# Altium PCB FT2232H.PcbDoc
Units mil, origin at the board's own origin, x right, y up, seen from the top; angles counter-clockwise.
Board outline 1955 x 1965 mil, 2 copper layers (Top Layer, Bottom Layer); 54 components, 55 nets, 224 pads, 68 vias.
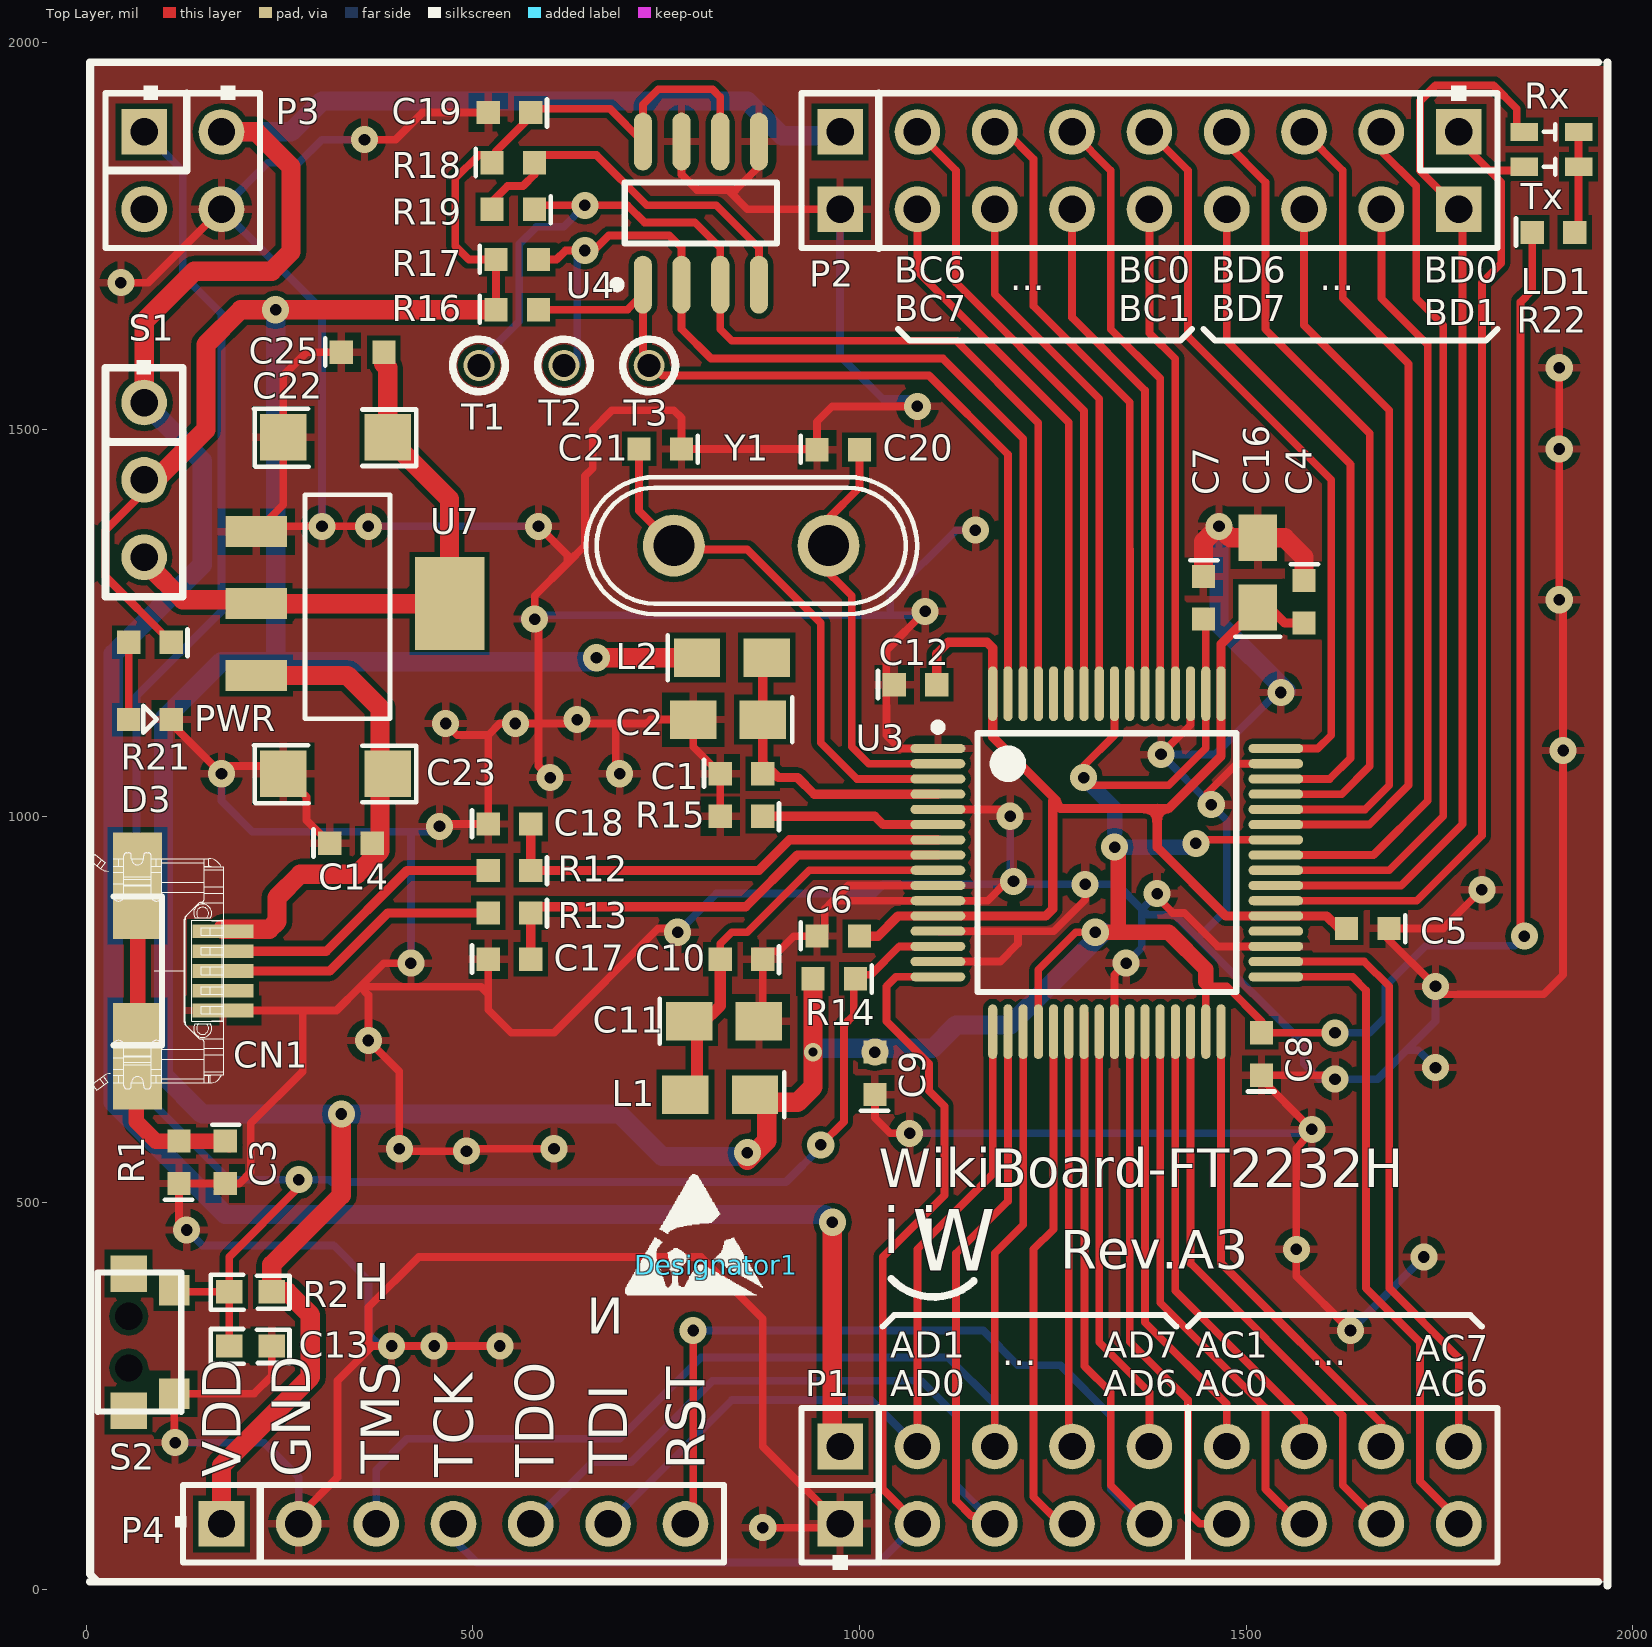
[diagram p0: Top Layer view]
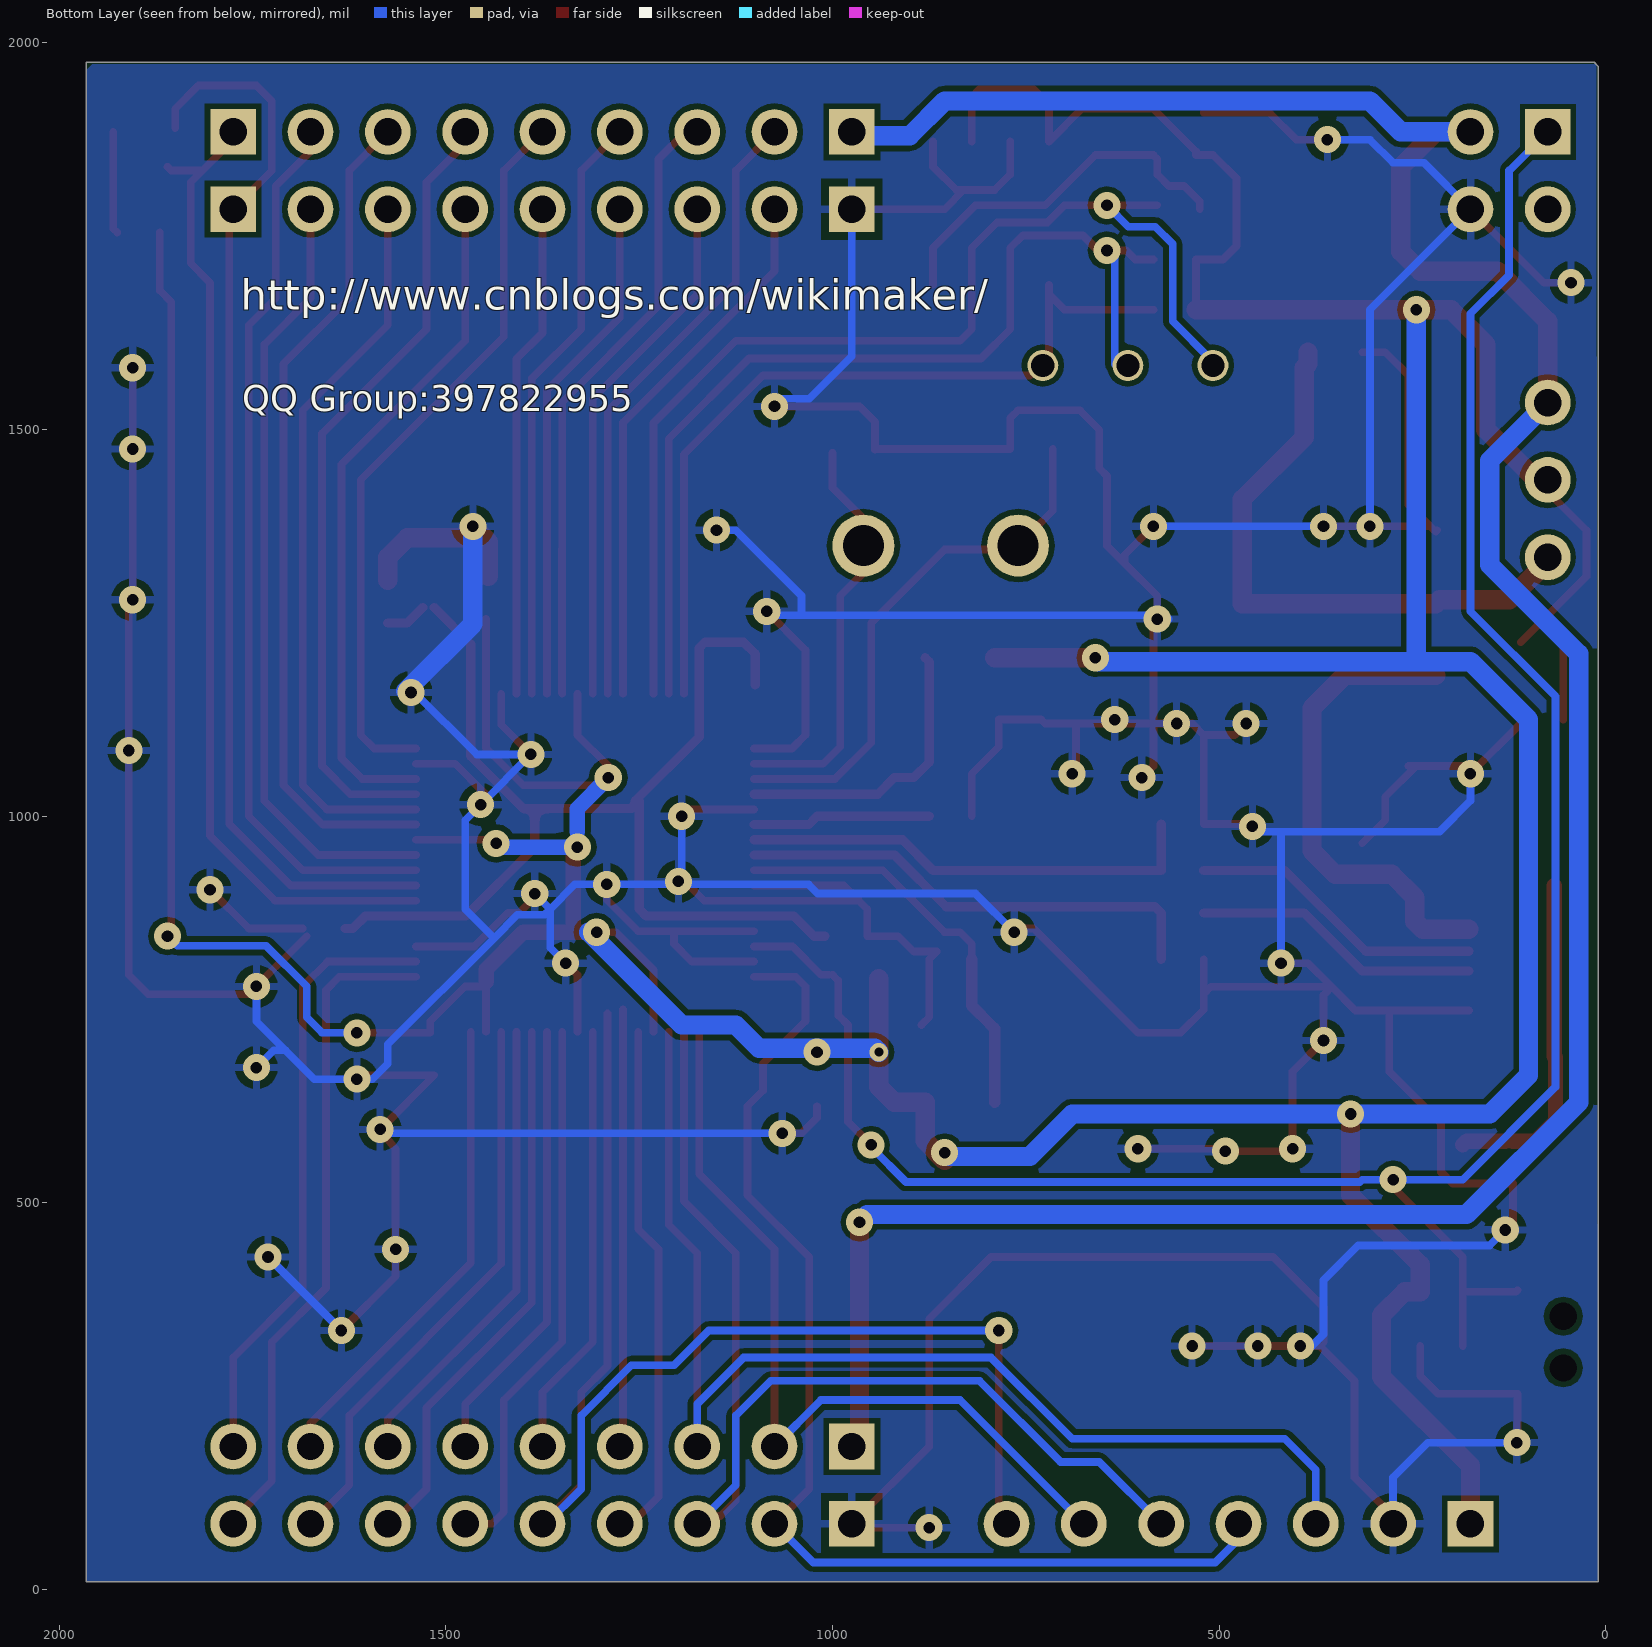
[diagram p1: Bottom Layer view, seen from below]

## Layer stack, top to bottom
Top Solder: solder mask 0.4, Solder Resist, Dk 3.5
Top Layer: signal copper 1.4
Dielectric1: dielectric 12.6, FR-4, Dk 4.8
Bottom Layer: signal copper 1.4
Bottom Solder: solder mask 0.4, Solder Resist, Dk 3.5

## Board outline
10,1970 15,1975 1965,1975 1965,10 10,10

## Design rules (kind name [scope] priority, off if disabled: settings)
Clearance [All] p1: gap=7
PolygonConnect [All] p1: connectstyle=Relief reliefconductorwidth=10 reliefentries=4 polygonreliefangle="90 Angle" airgapwidth=10
RoomDefinition FT2232H [InComponentClass('FT2232H')] p1: confinementstyle=ConfineIn formatcopy=TRUE lockcomponents=FALSE outline 0,0 1965,0 1965,1975 0,1975
RoomDefinition Connector&Power [InComponentClass('Connector&Power')] p2: confinementstyle=ConfineIn formatcopy=TRUE lockcomponents=FALSE outline 10,10 1965,10 1965,1970 10,1970
RoutingVias [All] p1: holewidth=15 width=35 viastyle="Through Hole" minholewidth=15 minwidth=35 maxholewidth=15 maxwidth=35
SilkToSolderMaskClearance SilkscreenOverComponentPads [IsPad] p1: minsilkscreentomaskgap=10 clearancetoexposedcopper=TRUE
SolderMaskExpansion [All] p1: expansion=4
Width [All] p1: maxlimit=50 minlimit=10 preferedwidth=10 minimp=50.000000 maximp=50.000000 favimp=50.000000
28 further rules are at their usual default settings.

## Classes and differential pairs
component class FT2232H: C1 C2 C3 C4 C5 C6 C7 C8 C9 C10 C11 C12 C14 C16 C17 C18 C19 C20 C21 CN1 L1 L2 R1 R12 R13 R14 R15 R16 R17 R18 R19 T1 T2 T3 U3 U4 Y1
component class Connector&Power: C13 C22 C23 C25 D3 LD1 P1 P2 P3 P4 R2 R21 R22 S1 S2 U7

## Components (designator, comment, footprint, x,y, rotation, side; value= is the part's Value field where it differs from the comment)
C1 "100nF" 0603M 820,1055 r0 top
C2 "4.7uF 16V" 0805M 875,1125 r180 top
C3 "47pF" 0603M 180,580 r270 top
C4 "100nF" 0603M 1575,1305 r270 top
C5 "100nF" 0603M 1685,855 r180 top
C6 "100nF" 0603M 945,845 r0 top
C7 "100nF" 0603M 1445,1310 r270 top
C8 "100nF" 0603M 1520,665 r90 top
C9 "100nF" 0603M 1020,640 r90 top
C10 "100nF" 0603M 875,815 r180 top
C11 "4.7uF 16V" 0805M 780,735 r0 top
C12 "100nF" 0603M 1045,1170 r0 top
C13 "10uF" 0603L 240,315 r180 top
C14 "100nF" 0603M 315,965 r0 top
C16 "3.3uF" 0805M 1515,1270 r90 top
C17 "47pF" 0603M 520,815 r0 top
C18 "47pF" 0603M 520,990 r0 top
C19 "0.1uF" 0603M 575,1910 r180 top
C20 "22pF" 0603M 945,1474 r0 top
C21 "22pF" 0603M 770,1475 r180 top
C22 "10uF 16V" 1206 390,1490 r180 top
C23 "10uF 16V" 1206 390,1055 r180 top
C25 "100n" 0603M 330,1600 r0 top
CN1 "USB-Micro" USB-MICRO-Lite 70,800 r90 top
D3 "RED" 0603pn 55,1125 r0 top
Designator1 "Comment" NoTouch 815,420 r0 top
L1 "Inductor" 0805M 865,640 r180 top
L2 "Inductor" 0805M 790,1205 r0 top
LD1 "LTST-C195KGJRKT" 0805-LED-Bi 1855,1865 r0 top
P1 "Header 9X2" HDR2X9/2.54MM#1 975,85 r0 top
P2 "Header 9X2" HDR2X9/2.54MM#2 1775,1885 r180 top
P3 "Header 2X2" HDR2X2/2.54MM 75,1885 r270 top
P4 "JTAG Header 7-Pin" HDR1X7/2.54MM 175,85 r0 top
R1 "27R" 0603M 120,525 r90 top
R2 "10K" 0603L 240,385 r180 top
R12 "27R" 0603M 575,930 r180 top
R13 "27R" 0603M 575,875 r180 top
R14 "10K" 0603M 995,790 r180 top
R15 "12K/1%" 0603M 875,1000 r180 top
R16 "10K" 0603M 530,1655 r0 top
R17 "10K" 0603M 530,1720 r0 top
R18 "10K" 0603M 525,1845 r0 top
R19 "2.2K" 0603M 580,1785 r180 top
R21 "1K" 0603M 110,1225 r180 top
R22 "1K" 0603M 1870,1755 r0 top
S1 "Switch" HDR1X3/2.54mm 75,1535 r270 top
S2 "" KEY-2x4-SMD 55,320 r90 top
T1 "TP" TP-HOLE 515,1580 r0 top
T2 "TP" TP-HOLE 625,1580 r0 top
T3 "TP" TP-HOLE 735,1580 r0 top
U3 "FT2232H" LQFP-64_N 1320,940 r0 top
U4 "93C46B" SO8_L 795,1780 r90 top
U7 "1117-3.3V" SOT-223 345,1275 r180 top
Y1 "12MHz" XTAL_socket 860,1350 r180 top

## Footprints (in the part's own frame and the unit in brackets; to place one, negate y for a bottom-side part, rotate by r counter-clockwise, add the part's x,y. Pads: shape width x height; smd on the part's side, far side on the other; paste and mask are expansions set on the pad)
0603L [mil] "0603 LONG"
  rect 33.94x30 smd: 1(0,0) 2(55,0)
  silkscreen extent -23,-22 79,23
0603M [mil]
  rect 30x30 smd: 1(0,0) 2(55,0)
  silkscreen extent -21,-17 -21,18, body extent -5,-15 60,15, height 43
0603pn [mil]
  rect 30x30 smd: 1(0,0) 2(55,0)
  silkscreen extent 19,-17 36,18
0805-LED-Bi [mm]
  rect 0.9x0.6 smd: 1(0.127,-0.635) 2(0.127,0.508) 3(1.905,0.508) 4(1.905,-0.635)
  silkscreen extent 0.76,-0.89 1.14,0.76, body extent 0.32,-1.02 1.72,0.9, height 1.1
0805M [mil]
  rect 60x50 smd: 1(0,0) 2(90,0)
  silkscreen extent -38,-29 -38,29
1206 [mil]
  rect 60x60 smd: 1(0,0) 2(135,0)
  silkscreen extent -37,-37 173,38, body extent 15,-30 120,30, height 43
HDR1X3/2.54mm [mm]
  round 1.5 hole 0.9: 1(0,0) 2(2.54,0) 3(5.08,0)
  silkscreen extent -1.4,-1.27 6.38,1.27
HDR1X7/2.54MM [mm] "Connector; Header; 7 Position"
  rect 1.5x1.5 hole 0.9: 1(0,0)
  round 1.5 hole 0.9: 2(2.54,0) 3(5.08,0) 4(7.62,0) 5(10.16,0) 6(12.7,0) 7(15.24,0)
  silkscreen extent -1.52,-1.27 16.51,1.27
HDR2X2/2.54MM [mm] "Connector; Header; 2x2 Position"
  rect 1.5x1.5 hole 0.9: 1(0,0)
  round 1.5 hole 0.9: 2(0,2.54) 3(2.54,0) 4(2.54,2.54)
  silkscreen extent -1.52,-1.27 3.81,3.81
HDR2X9/2.54MM#1 [mm]
  rect 1.5x1.5 hole 0.9: 1(0,0) 2(0,2.54)
  round 1.5 hole 0.9: 3(2.54,0) 4(2.54,2.54) 5(5.08,0) 6(5.08,2.54) 7(7.62,0) 8(7.62,2.54) 9(10.16,0) 10(10.16,2.54) 11(12.7,0) 12(12.7,2.54) 13(15.24,0) 14(15.24,2.54) 15(17.78,0) 16(17.78,2.54) 17(20.32,0) 18(20.32,2.54)
  silkscreen extent -1.27,-1.52 21.59,3.81
HDR2X9/2.54MM#2 [mm]
  rect 1.5x1.5 hole 0.9: 1(0,0) 2(0,2.54) 17(20.32,0) 18(20.32,2.54)
  round 1.5 hole 0.9: 3(2.54,0) 4(2.54,2.54) 5(5.08,0) 6(5.08,2.54) 7(7.62,0) 8(7.62,2.54) 9(10.16,0) 10(10.16,2.54) 11(12.7,0) 12(12.7,2.54) 13(15.24,0) 14(15.24,2.54) 15(17.78,0) 16(17.78,2.54)
  silkscreen extent -1.27,-1.52 21.59,3.81
KEY-2x4-SMD [mm] "6.8MM,2.8MM,SMD"
  rect 1.2x1.2 smd: 0(-2.25,0) 0(2.25,0)
  rect 1x1 smd: 1(-1.7,-1.5) 2(1.7,-1.5)
  round 0.8 hole 0.9 unplated: MH1(0.85,0) MH2(-0.85,0)
  silkscreen extent -2.29,-1.73 2.29,1.02, body extent -2.28,-1.6 2.29,0.94, height 1.1
LQFP-64_N [mm] "Thin QFP, 64-Leads, Body 10x10mm, Pitch 0.5mm, IPC Medium Density"
  oval 1.8x0.3 smd: 1(-5.55,3.75) 2(-5.55,3.25) 3(-5.55,2.75) 4(-5.55,2.25) 5(-5.55,1.75) 6(-5.55,1.25) 7(-5.55,0.75) 8(-5.55,0.25) 9(-5.55,-0.25) 10(-5.55,-0.75) 11(-5.55,-1.25) 12(-5.55,-1.75) 13(-5.55,-2.25) 14(-5.55,-2.75) 15(-5.55,-3.25) 16(-5.55,-3.75) 33(5.55,-3.75) 34(5.55,-3.25) 35(5.55,-2.75) 36(5.55,-2.25) 37(5.55,-1.75) 38(5.55,-1.25) 39(5.55,-0.75) 40(5.55,-0.25) 41(5.55,0.25) 42(5.55,0.75) 43(5.55,1.25) 44(5.55,1.75) 45(5.55,2.25) 46(5.55,2.75) 47(5.55,3.25) 48(5.55,3.75)
  oval 0.3x1.8 smd: 17(-3.75,-5.55) 18(-3.25,-5.55) 19(-2.75,-5.55) 20(-2.25,-5.55) 21(-1.75,-5.55) 22(-1.25,-5.55) 23(-0.75,-5.55) 24(-0.25,-5.55) 25(0.25,-5.55) 26(0.75,-5.55) 27(1.25,-5.55) 28(1.75,-5.55) 29(2.25,-5.55) 30(2.75,-5.55) 31(3.25,-5.55) 32(3.75,-5.55) 49(3.75,5.55) 50(3.25,5.55) 51(2.75,5.55) 52(2.25,5.55) 53(1.75,5.55) 54(1.25,5.55) 55(0.75,5.55) 56(0.25,5.55) 57(-0.25,5.55) 58(-0.75,5.55) 59(-1.25,5.55) 60(-1.75,5.55) 61(-2.25,5.55) 62(-2.75,5.55) 63(-3.25,5.55) 64(-3.75,5.55)
  silkscreen extent -5.67,-4.25 4.25,4.57, body extent -5,-5 5,5, height 1.6
NoTouch [mil]
  silkscreen extent -118,-39 60,117
SO8_L [mm] "SOIC, 8-Leads, Body 4.9x3.9mm, Pitch 1.27mm, IPC High Density"
  oval 1.9x0.6 smd: 1(-2.35,1.905) 2(-2.35,0.635) 3(-2.35,-0.635) 4(-2.35,-1.905) 5(2.35,-1.905) 6(2.35,-0.635) 7(2.35,0.635) 8(2.35,1.905)
  silkscreen extent -2.47,-2.5 1,2.88, body extent -2,-2.5 2,2.5, height 1.75
SOT-223 [mil]
  rect 80x40 smd: 1(125,-93) 2(125,0) 3(125,93)
  rect 90x120 smd: 2(-125,0)
  silkscreen extent -48,-141 62,149, body extent -80,-140 80,150, height 63
TP-HOLE [mil] "TEST POINT"
  round 40 hole 30: 1(-7,3)
  silkscreen extent -41,-31 27,37
USB-MICRO-Lite [mm] "Connector; USB2.0, Type B, SM; 5 Position; Right Angle"
  rect 3.5x1.6 smd: 0(-2.802,0.088) 0(2.798,0.088)
  rect 0.45x2 smd: 1(1.298,-2.714) 2(0.648,-2.714) 3(-0.002,-2.714) 4(-0.652,-2.714) 5(-1.302,-2.714)
  silkscreen extent -3.92,-2.74 3.88,1.65
XTAL_socket [mil]
  round 80 hole 53: 1(100,0) 2(-100,0)
  silkscreen extent -215,-89 214,89

## Part data
C1 C3 C4 C5 C6 C7 C8 C9 C10 C12 C13 C14 C16 C17 C18 C19 C20 C21 C25: library part Cap, "Capacitor"
C2 C11 C22 C23: library part "Cap Pol1", "Polarized Capacitor (Radial)"
D3: library part LED0, "Typical INFRARED GaAs LED"
LD1: "Avago, HSMF-A203 Bi-Color LED"
P1 P2: "Header, 9-Pin, Dual row"
P3: "Header, 2-Pin, Dual row"
P4: "Header, 7-Pin"
R1 R2 R12 R13 R14 R15 R16 R17 R18 R19 R21 R22: library part Res2, "Resistor"
S1: library part SW-SPDT, "SPDT Subminiature Toggle Switch, Right Angle Mounting, Vertical Actuation"
S2: library part SW-PB, "Switch"
T1 T2 T3: "Test Point"
U3: library part FT2232HL-Reel, "Dual High Speed USB To Multipurpose UART/FIFO IC, LQFP-64, Tape and Reel"
U4: "1K Microwire Compatible Serial EEPROM"
U7: library part 1117, "1117- 3.3 2.5 1.8"
Y1: library part XTAL, "Crystal Oscillator"

## Via types
v1: diameter 35, hole 15, Top Layer to Bottom Layer, 67 vias
v2: diameter 23.62, hole 11.81, Top Layer to Bottom Layer, 1 vias

## Nets (pads, with @x,y where several pads share a name; then routed paths per layer and width w, separated by ;. In a path a pad name is that pad's centre, name@x,y a point inside that pad or via, vN(x,y) a via of type N, cw(c..) or ccw(c..) an arc to the next point about the centre after c; other vN are vias at no path point)
D1V8: C4.2 C5.2 C6.2 C12.2 C16.1 U3.12 U3.37 U3.49 U3.64 | length 1606.5
  Top Layer w12: C6.2@1010,845 1023.9,845 1050,871.1 U3.12 1241.1,871.1 1250,880 1250,1020 1260,1010 1385,1010 ; C12.2 1100,1210 1115,1225 1165,1225 1172.36,1217.64 U3.64 1172.36,1102.64 1255,1020 1255,1015 ; C16.1 1467.64,1222.64 U3.49 1467.64,1077.64 1400,1010 1385,1010 ; C16.1@1530,1270 1550,1250 C4.2 ; C5.2 1620,855 1603.9,871.1 U3.37 1473.9,871.1 1385,960 1385,1010
D3V3: C22.1 C25.2 S1.3 U7.2 | length 785.9
  Top Layer w25: S1.3@80,1340 80,1325 125,1280 215,1280 220,1275 470,1275 470,1410 C22.1 390,1580 385,1585 C25.2
FTAC0: P1.11 U3.26 | length 709
  Top Layer w10: U3.26 1349.53,320.47 1425,245 1425,100 1440,85 P1.11
FTAC1: P1.12 U3.27 | length 580.3
  Top Layer w10: U3.27 1369.21,345.79 1475,240 P1.12
FTAC2: P1.13 U3.28 | length 716.5
  Top Layer w10: U3.28 1388.9,371.1 1525,235 1525,130 1570,85 P1.13
FTAC3: P1.14 U3.29 | length 605.4
  Top Layer w10: U3.29 1408.58,386.42 1575,220 P1.14
FTAC4: P1.15 U3.30 | length 738.7
  Top Layer w10: U3.30 1428.27,421.73 1625,225 1625,135 P1.15
FTAC5: P1.16 U3.32 | length 622.4
  Top Layer w10: U3.32 1467.64,422.36 1675,215 P1.16
FTAC6: P1.17 U3.33 | length 863.4
  Top Layer w10: U3.33 1637.64,792.36 1655,775 1655,390 1725,320 1725,140 1775,90 P1.17
FTAC7: P1.18 U3.34 | length 792
  Top Layer w10: U3.34 1652.95,812.05 1685,780 1685,390 1775,300 P1.18
FTAD0: P1.3 P4.4 U3.16 | length 1502.6
  Top Layer w10: P1.3 1030,130 1030,430 1110,510 1110,625 1090,645 1090,680 1035,735 1035,780 1047.36,792.36 U3.16
  Bottom Layer w10: P4.4 475,65 505,35 1025,35 P1.3
FTAD1: P1.4 P4.6 U3.17 | length 1068
  Top Layer w10: P1.4 1075,440 1172.36,537.36 U3.17
  Bottom Layer w10: P4.6 835,245 1015,245 P1.4
FTAD2: P1.5 P4.5 U3.18 | length 1503.5
  Top Layer w10: P1.5@1165,95 1145,95 1125,115 1125,435 1192.05,502.05 U3.18
  Bottom Layer w10: P4.5@590,85 P4.5 655,165 670,165 705,165 810,270 1080,270 1125,225 1125,135 P1.5
FTAD3: P1.6 P4.3 U3.19 | length 1561.6
  Top Layer w10: P1.6 1175,435 1211.73,471.73 U3.19
  Bottom Layer w10: P4.3 375,155 415,195 690,195 795,300 1115,300 1175,240 P1.6
FTAD4: P1.7 U3.21 | length 661.8
  Top Layer w10: U3.21 1251.1,466.1 1225,440 1225,120 P1.7@1260,85
FTAD5: P1.8 U3.22 | length 566.7
  Top Layer w10: U3.22@1270.79,750 1270.79,189.21 P1.8
FTAD6: P1.9 P4.7 U3.23 | length 1698.2
  Top Layer w10: P4.7 785,95 v1(785,335) ; U3.23@1290.94,745 1290.94,289.05 1325,255 1325,135 P1.9
  Bottom Layer w10: v1(785,335) 1160,335 1205,290 1260,290 1325,225 1325,130 1370,85 P1.9
FTAD7: P1.10 U3.24 | length 563.4
  Top Layer w10: U3.24 1310.16,319.84 1375,255 P1.10
FTBC0: P2.9 U3.48 | length 956
  Top Layer w10: P2.9 1425,1835 1425,1620 1610,1435 1610,1105 1592.64,1087.64 U3.48
FTBC1: P2.10 U3.52 | length 640.4
  Top Layer w10: P2.10 1375,1625 1408.58,1591.42 U3.52
FTBC2: P2.11 U3.53 | length 773.7
  Top Layer w10: P2.11 1325,1835 1325,1630 1388.9,1566.1 U3.53
FTBC3: P2.12 U3.54 | length 665.5
  Top Layer w10: P2.12 1275,1645 1369.21,1550.79 U3.54
FTBC4: P2.13 U3.55 | length 994.3
  Top Layer w10: P2.13 1190,1885 1225,1850 1225,1660 1349.53,1535.47 U3.55 1350,1158.98 1350,1345
FTBC5: P2.14 U3.57 | length 682.5
  Top Layer w10: P2.14 1175,1675 1310.16,1539.84 U3.57
FTBC6: P2.15 U3.58 | length 815.7
  Top Layer w10: P2.15 1125,1835 1125,1690 1290.47,1524.53 U3.58
FTBC7: P2.16 U3.59 | length 707.6
  Top Layer w10: P2.16 1075,1705 1270.79,1509.21 U3.59
FTBD0: LD1.1 P2.1 U3.38 | length 1291.6
  Top Layer w10: U3.38 1720.79,890.79 1805,975 1805,1690 1830,1715 1830,1820 1815,1835 ; P2.1 1775,1875 1815,1835 ; LD1.1 1855,1835 1815,1835
FTBD1: LD1.2 P2.2 U3.39 | length 1402.9
  Top Layer w10: U3.39 1700.47,910.47 1780,990 1780,1780 P2.2 1725,1835 1725,1925 1745,1945 1820,1945 1850,1915 LD1.2@1850,1890
FTBD2: P2.3 U3.40 | length 1163.6
  Top Layer w10: U3.40 1685.16,930.16 1755,1000 1755,1635 1720,1670 1720,1815 1675,1860 P2.3
FTBD3: P2.4 U3.41 | length 1015.4
  Top Layer w10: U3.41 1664.84,949.84 1735,1020 1735,1610 1675,1670 P2.4
FTBD4: P2.5 U3.43 | length 1093.5
  Top Layer w10: U3.43 1659.21,989.21 1710,1040 1710,1585 1625,1670 1625,1835 P2.5
FTBD5: P2.6 U3.44 | length 949.9
  Top Layer w10: U3.44 1653.9,1008.9 1685,1040 1685,1525 1575,1635 P2.6
FTBD6: P2.7 U3.45 | length 1033.2
  Top Layer w10: P2.7 1475,1870 1525,1820 1525,1630 1660,1495 1660,1065 1623.58,1028.58 U3.45
FTBD7: P2.8 U3.46 | length 883.8
  Top Layer w10: P2.8 1475,1615 1635,1455 1635,1075 1608.27,1048.27 U3.46
FTCLK: R17.2 T2.1 U3.62 U4.2 | length 1290.5
  Top Layer w10: R17.2 608.33,1720 620,1731.67 v1(645,1731.67) 656.67,1731.67 676,1751 754,1751 770,1735 U4.2 770,1630 808,1592 1108,1592 1211.73,1488.27 U3.62
  Bottom Layer w10: T2.1@635,1585 635,1721.67 v1(645,1731.67)
FTCS: R16.2 T3.1 U3.63 U4.1 | length 1069.9
  Top Layer w10: R16.2 700,1655 U4.1@720,1675 ; U4.1 U4.1@720,1675 ; U3.63 1192.05,1467.95 1090,1570 745,1570 735,1580 720,1595 U4.1@720,1675
FTDI: R19.1 T1.1 U3.61 U4.3 | length 1476
  Top Layer w10: R19.1@580,1790 v1(645,1790) 700,1790 722,1768 787,1768 820,1735 U4.3 820,1630 835,1615 1125,1615 1231.42,1508.58 U3.61
  Bottom Layer w10: T1.1@510,1570 510,1590 560,1640 560,1740 582.5,1762.5 617.5,1762.5 v1(645,1790)
FTDO: R18.2 R19.2 U4.4 | length 488.8
  Top Layer w10: R19.2 525,1795 545,1815 565,1815 580,1830 580,1850 585,1855 660,1855 725,1790 815,1790 870,1735 U4.4
GND: C1.1 C2.2 C3.2 C4.1 C5.1 C6.1 C7.1 C8.1 C9.1 C10.1 C11.2 C12.1 C13.1 C14.1 C16.2 C17.1 C18.1 C19.2 C20.1 C21.1 C22.2 C23.2 C25.1 CN1.5 D3.2 P1.1 P2.18 P3.4 P4.2 R1.1 R15.2 S2.1 U3.1 U3.5 U3.10 U3.11 U3.13 U3.15 U3.25 U3.35 U3.47 U3.51 U4.5 U4.7 U7.1 | length 16322.4
  Top Layer w10: v1(45,1690) 80,1690 P3.4 ; D3.2 110,1120 v1(175,1055) 185,1065 C23.2@245,1065 ; v1(115,190) 114.06,190.94 S2.1 216.93,253.07 240,276.14 C13.1 ; v1(130,465) 120,475 R1.1 C3.2 198,525 213,540 213,603 280,670 280,748.76 ; CN1.5 280,748.76 ; U7.1@218,1370 U7.1 U7.1@227,1375 ; C23.2@255,1065 C23.2@245,1065 ; P4.2@268.07,78.07 P4.2 275,95 325,145 325,270 370,315 ; C14.1 285,995 285,1025 C23.2@245,1065 ; C25.1@315,1600 285,1600 255,1570 C22.2 255,1403 U7.1@227,1375 ; 360,305 370,315 ; v1(360,1875) 400,1875 435,1910 C19.2 ; v1(365,1375) v1(305,1375) U7.1@227,1375 ; v1(395,315) 370,315 ; v1(420,810) 385,810 354.38,779.38 ; v1(456.91,986.91) 460,990 C18.1 520,1105 ; v1(465,1120) 480,1105 520,1105 ; C17.1 520,770 ; v1(535,315) v1(450,315) 370,315 ; v1(585,1375) 622.5,1337.5 622.5,1327.5 ; v1(600,1050) 585,1065 585,1120 ; v1(605,570) 495,570 v1(491.91,566.91) 408.09,566.91 v1(405,570) 405,670 v1(365,710) 365,768.76 354.38,779.38 ; v1(690,1055) 685,1060 685,1120 ; v1(765,850) 760,855 740,855 605,720 550,720 520,750 520,770 ; U4.7 770,1830 790,1810 830,1810 ; R15.2 C1.1 785,1090 C2.2 730,1125 725,1120 685,1120 ; U4.5 870,1840 840,1810 830,1810 ; v1(875,80) 970,80 P1.1 875,185 875,350 795,430 430,430 365,365 365,320 370,315 ; C11.2@885,730 875,740 C10.1 865,825 895,825 915,845 955,845 955,880 965.79,890.79 ; P2.18 855,1785 830,1810 ; C9.1@1020,625 1020,610 1040,590 v1(1065,590) ; v1(1075,1530) 965,1530 945,1510 C20.1 944,1475 C21.1 770,1515 760,1525 680,1525 655,1500 655,1450 645,1440 645,1350 622.5,1327.5 ; v1(1085,1265) 1035,1215 1035,1105 1052.36,1087.64 U3.1 ; U3.15 1182.05,812.05 1205,835 1205,851.42 ; U3.13 1205,851.42 ; U3.10 985.47,910.47 965.79,890.79 ; U3.5 1186.1,1008.9 v1(1195,1000) ; v1(1199.21,915.79) 1190.79,915.79 1165.79,890.79 U3.11 965.79,890.79 ; v1(1291.91,911.91) 1291.91,891.91 1251.42,851.42 1205,851.42 ; U3.25 1329.84,794.84 v1(1345,810) ; v1(1385,900) 1380,900 1405,875 1420,875 1463.27,831.73 U3.35 ; v1(1390,1080) 1428.27,1118.27 U3.51 ; v1@1450,1030 1487.95,1067.95 U3.47 ; v1(1615,660) 1610,665 1515,665 v1(1585,595) 1565,570 v1(1565,440) 1565,405 v1(1635,335) ; C5.1@1680,845 v1(1745,780) 1755,770 1885,770 1910,795 v1(1910,1085) 1910,1275 v1(1905,1280) v1(1905,1475) v1(1905,1580) ; C5.1 1755,855 v1(1805,905) ; 280,748.76 323.76,748.76 354.38,779.38 ; 354.38,779.38 510.62,779.38 520,770 ; 520,1105 535,1120 v1(555,1120) 585,1120 ; 585,1120 585,1250 v1(580,1255) 580,1285 622.5,1327.5 ; 585,1120 685,1120
  Top Layer w25: C7.1 1445,1355 v1(1465,1375) 1480,1360 C16.2 1550,1360 1575,1335 C4.1
  Bottom Layer w10: v1(115,190) 230,190 275,145 P4.2 ; v1(130,465) 150,445 320,445 365,400 365,330 380,315 v1(395,315) ; v1(175,1055) 175,1020 215,980 420,980 ; v1(305,1375) 305,1655 P3.4 235,1845 275,1845 305,1875 v1(360,1875) ; v1(365,1375) v1(585,1375) ; v1(420,810) 420,980 ; v1@450,980 420,980 ; v1@565,1255 v1(580,1255) 585,1260 1040,1260 ; v1(765,850) 815,900 1019.21,900 1031.13,911.91 v1@1195,911.91 ; P2.18 975,1595 1030,1540 1065,1540 v1(1075,1530) ; v1(1065,590) 1585,590 v1(1585,595) ; v1(1085,1265) 1090,1265 1085,1260 1040,1260 ; v1(1150,1370) 1125,1370 1040,1285 1040,1260 ; v1(1195,1000) v1@1195,911.91 ; v1(1345,810) 1365,830 1365,880 ; v1(1385,900) 1365,880 ; v1@1551.91,1161.91 1541.91,1161.91 1460,1080 v1(1390,1080) v1(1455,1015) 1475,995 1475,880 1437.5,842.5 ; v1(1635,335) v1(1730,430) ; v1(1745,675) 1722.5,697.5 1707.5,697.5 ; v1(1745,780) 1745,735 1707.5,697.5 ; v1@1195,911.91 v1(1291.91,911.91) 1333.09,911.91 1365,880 ; 1365,880 1372.5,872.5 1407.5,872.5 1437.5,842.5 ; 1437.5,842.5 1575,705 1575,680 1595,660 1670,660 1707.5,697.5
  Bottom Layer w25: v1(1465,1375) 1465,1248.83 v1@1551.91,1161.91
  other v1: 635,1125 1545,1160
NetC1_2: C1.2 C2.1 L2.2 U3.4 | length 380.7
  Top Layer w12: L2.2 875,1200 C2.1 875,1070 895,1050 920,1050 941.42,1028.58 U3.4
NetC3_1: C3.1 CN1.0 R1.2 | length 428.2
  Top Layer w20: CN1.0@66.54,910.17 66.54,689.7 65,688.16 65,605 90,580 R1.2 ; R1.2@130,580 C3.1 C3.1@185,575
NetC10_2: C10.2 C11.1 L1.2 U3.9 | length 538.3
  Top Layer w10: C10.2 820,835 835,850 855,850 935.16,930.16 U3.9
  Top Layer w15: L1.2@790,630 790,725 795,730 820,755 C10.2
NetC17_2: C17.2 R13.1 U3.8 | length 617.5
  Top Layer w12: C17.2 R13.1 583,883 853,883 919.84,949.84 U3.8
NetC18_2: C18.2 R12.1 U3.7 | length 602.9
  Top Layer w12: C18.2 R12.1 870,930 909.53,969.53 U3.7
NetC20_2: C20.2 U3.2 Y1.2 | length 537.9
  Top Layer w10: Y1.2@945,1345 945,1330 990,1285 990,1090 1012.05,1067.95 U3.2 ; Y1.2 960,1385 1000,1425 C20.2@1000,1470
  Bottom Layer w10: Y1.2@940,1350 Y1.2@945,1345
NetC21_2: C21.2 U3.3 Y1.1 | length 700.9
  Top Layer w10: C21.2 715,1395 Y1.1 765,1345 855,1345 950,1250 950,1095 996.73,1048.27 U3.3
NetCN1_2: CN1.2 R12.2 | length 386.4
  Top Layer w12: CN1.2 310.53,825.53 415,930 R12.2
NetCN1_3: CN1.3 R13.2 | length 374.2
  Top Layer w12: CN1.3 314.94,799.94 390,875 R13.2
NetD3_1: D3.1 R21.2 | length 100
  Top Layer w10: D3.1 R21.2
NetLD1_3: LD1.3 LD1.4 R22.2 | length 132.1
  Top Layer w10: R22.2 1930,1760 LD1.4 LD1.3
NetR15_1: R15.1 U3.6 | length 231
  Top Layer w12: R15.1 1020,1000 1030.79,989.21 U3.6
NRST: C13.2 P3.1 R2.2 R14.1 S2.2 U3.14 | length 2946
  Top Layer w10: S2.2 115.98,385 R2.2 ; C13.2 R2.2 ; v1@275,520 185,430 R2.2 ; v1(950,575) 980,605 980,730 992.5,742.5 992.5,787.5 R14.1 R14.1@1000,795 ; R14.1@1005,795 1015,795 1051.73,831.73 U3.14
  Bottom Layer w10: P3.1 125,1835 125,1700 175,1650 175,1265 65,1155 65,650 185,530 v1(275,530) 315,530 318,527 905,527 950,572 v1(950,575)
PDVDD: P1.2 P2.17 P3.2 S1.1 | length 3660.2
  Top Layer w25: S1.1 75,1640 140,1705 240,1705 265,1730 265,1840 220,1885 P3.2 ; v1(965,475) 965,195 P1.2
  Bottom Layer w25: S1.1 150,1460 150,1325 35,1210 35,630 180,485 955,485 v1(965,475) ; P3.2 265,1885 305,1925 855,1925 900,1880 970,1880 P2.17
USB5V: C14.2 C23.1 CN1.1 U7.3 | length 625.6
  Top Layer w25: CN1.1@176.86,853.89 236.86,853.89 246.86,863.89 246.86,895 276.86,925 350,925 380,955 380,1065 380,1140 338,1182 U7.3
VCCIO: C7.2 C8.2 C9.2 C19.1 L1.1 L2.1 P4.1 R2.1 R14.2 R16.1 R17.1 R18.1 R21.1 R22.1 S1.2 U3.20 U3.31 U3.42 U3.50 U3.56 U4.6 U4.8 | length 8171.4
  Top Layer w10: S1.2@80,1425 25,1370 25,1310 R21.1 ; R16.1 R17.1 495,1720 477.5,1737.5 477.5,1825 507.5,1855 530,1855 530,1860 585,1915 677.52,1915 U4.8 720,1920 740,1940 810,1940 820,1930 U4.6 ; U3.20 1231.42,801.42 1280,850 1285,850 ; U3.56 1329.84,1105 1290,1065.16 v1(1290,1050) 1300,1040 1400,1040 1447.95,1087.95 U3.50 C7.2@1447.95,1255 ; v1@1434.53,969.53 U3.42 ; U3.31 1447.95,780 ; 1447.95,786.02 1447.95,780 ; v1(1615,720) C8.2 1520,735 1475,780 1447.95,780 ; v1(1860,845) 1855,850 1855,1665 1870,1680 R22.1
  Top Layer w20: v1(1305,850) 1335,850 ; v1(1330,960) 1335,955 1335,850 ; 1447.95,786.02 1447.95,802.05 1400,850 1335,850
  Top Layer w25: S1.2@80,1425 155,1500 155,1610 200,1655 v1(245,1655) R16.1 ; P4.1 175,160 290,275 290,355 260,385 R2.1 240,420 330,510 v1(330,615) ; v1(660,1205) L2.1 ; v1(855,565) 855,555 880,580 880,630 920,630 940,650 R14.2
  Bottom Layer w10: v1(1330,960) 1330,980 ; v1(1615,720) 1660,720 1680,740 1680,780 1732.5,832.5 1847.5,832.5 v1(1860,845)
  Bottom Layer w20: v1(1290,1050) 1330,1010 1330,980 ; v1(1330,960) 1430,960 v1(1435,965)
  Bottom Layer w25: v1(245,1655) 245,1205 240,1200 ; v1(660,1205) 655,1200 240,1200 ; v1@850,560 745,560 690,615 v1(330,615) 150,615 100,665 100,1125 175,1200 240,1200 ; v2(940,695) 945,700 1095,700 1125,730 1195,730 1315,850 v1(1305,850)
  other v1: 1020,695
pads on no net: CN1.4 P3.3 S2.0 S2.MH1 S2.MH2 U3.36 U3.60

## Polygon pours and split planes (outlines as drawn)
GND on Top Layer "Top Layer-No Net" (solid, remove dead copper, pour order 2): 10,1970 1965,1970 1965,10 10,10
GND on Bottom Layer "Top Layer-No Net" (solid, remove dead copper, pour order 4): 12.5,1972.5 1957.5,1972.5 1965,1965 1965,10 10,10

## Silkscreen, mask and mechanical layers (free items; w line width, h text height)
Top Overlay:
  lines w7.87: 1030,340 1045,355 1395,355 1410,340 ; 1050,1630 1065,1615 1415,1615 1430,1630 ; 1425,340 1440,355 1790,355 1805,340 ; 1445,1630 1460,1615 1810,1615 1825,1630
  lines w8: 1025,35 1025,235 ; 1425,35 1425,235
  lines w10: 5,10 1955,10 ; 15,10 5,20 5,1975 1955,1975 ; 1025,1735 1025,1935 ; 1041,402 ccw(c1096,454) 1148,399 ; 1967.52,5 1967.52,1975
  text "Rx" at 1860,1915 h33.46
  text "Tx" at 1855,1785 h33.46
  text "BC6" at 1045,1690 h33.46
  text "BC0" at 1335,1690 h33.46
  text "BD6" at 1455,1690 h33.46
  text "BD0" at 1730,1690 h33.46
  text "..." at 1195,1680 h33.46
  text "..." at 1595,1680 h33.46
  text "BC7" at 1045,1640 h33.46
  text "BC1" at 1335,1640 h33.46
  text "BD7" at 1455,1640 h33.46
  text "BD1" at 1730,1635 h33.46
  text "PWR" at 140,1110 h33.46
  text "WikiBoard-FT2232H" at 1025,520 h50
  text "i i" at 1030,435 h60
  text "Rev.A3" at 1260,415 h50
  text "W" at 1068,412 h80
  text "H" at 345,360 h80
  text "N" at 695,315 h80
  text "AD1" at 1040,300 h33.46
  text "AD7" at 1315,300 h33.46
  text "AC1" at 1435,300 h33.46
  text "AC7" at 1720,295 h33.46
  text "..." at 1185,290 h33.46
  text "..." at 1585,290 h33.46
  text "AD0" at 1040,250 h33.46
  text "AD6" at 1315,250 h33.46
  text "AC0" at 1435,250 h33.46
  text "AC6" at 1720,250 h33.46
  text "RST" at 800,155 h50 r90
  text "TMS" at 405,150 h50 r90
  text "TDI" at 700,150 h50 r90
  text "VDD" at 200,145 h50 r90
  text "GND" at 290,145 h50 r90
  text "TCK" at 500,145 h50 r90
  text "TDO" at 605,145 h50 r90
Bottom Overlay:
  text "http://www.cnblogs.com/wikimaker/" at 1765,1655 h39.37
  text "QQ Group:397822955" at 1763,1524 h33.46